# EAGLE board roller_sensor (EAGLE 4.16)
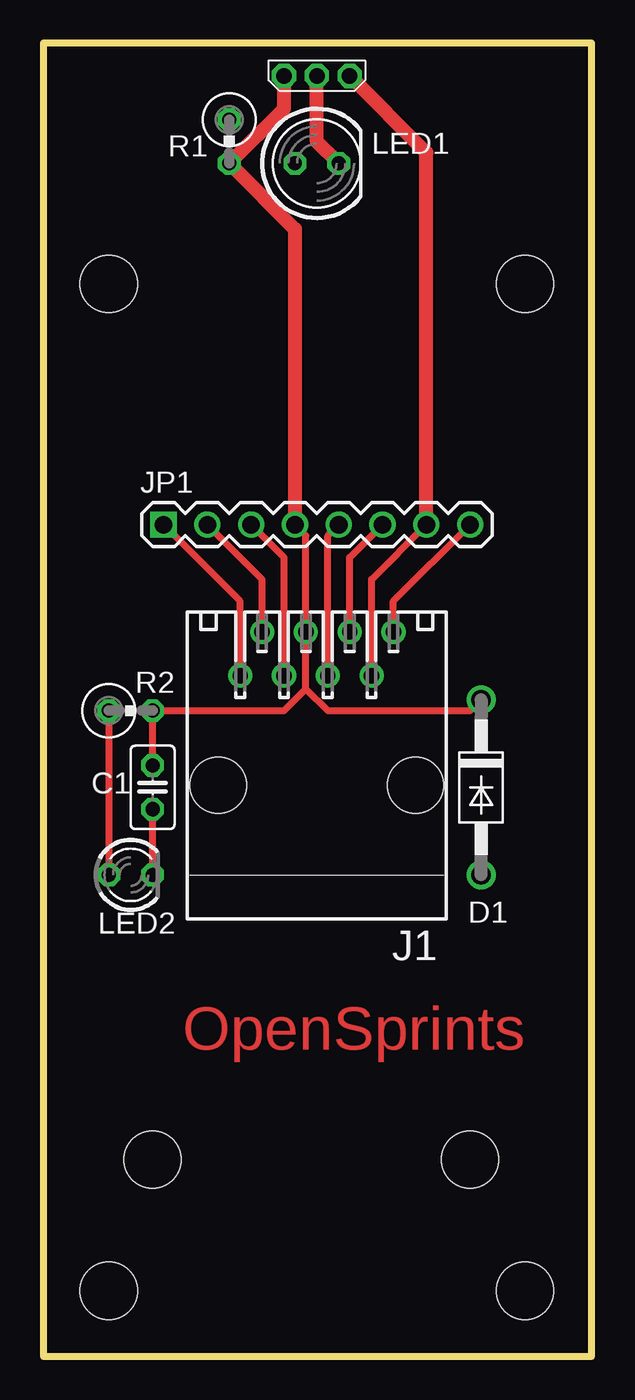
[diagram p0: board, top side]
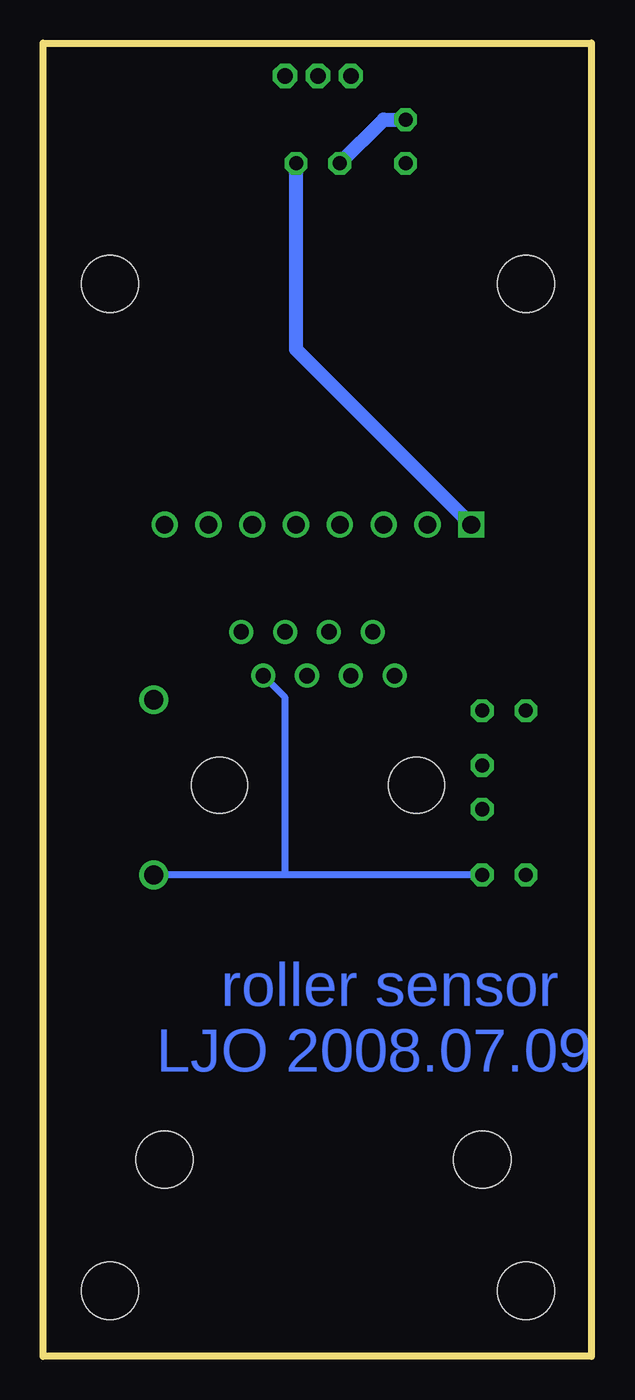
[diagram p1: board, bottom side, seen from below]

Size 31.8 x 76.19 mm. Coordinates in mm from the lower left corner, seen from the top.
Outline: 0,0 31.8,0 31.8,76.19 0,76.19 0,0
Copper layers (1*16): Top 0.035mm / dielectric 1.5mm / Bottom 0.035mm
Design rules "default": minimum track width 10mil, minimum drill 24mil, track to track 8mil, track to pad 8mil, pad to pad 8mil, via to via 8mil, smd to smd 8mil, copper to edge 40mil, drill to drill 8mil, minimum pad ring 10mil, minimum via ring 8mil, stop-mask expansion 4mil, vias tented up to drill 0mil, thermal gap 10mil

## Footprints (pad centres in the part's own frame; a part is rotated, then mirrored left to right if it is on the bottom)
C025-025X050 = drill 0.813 octagon: 1 -1.27,0; 2 1.27,0
DO41-10 = drill 1.118 round: A 5.08,0; C -5.08,0
A3245 = drill 0.9 pad 1.016 octagon: P$1 0,1.905; P$2 0,0; P$3 0,-1.905
555164-1 = drill 0.889 round: 1 -4.445,5.207; 2 -3.175,7.747; 3 -1.905,5.207; 4 -0.635,7.747; 5 0.635,5.207; 6 1.905,7.747; 7 3.175,5.207; 8 4.445,7.747 | hole 3.251: -5.715,-1.143; 5.715,-1.143
1X08 = drill 1.016 square: 1 0,0 | drill 1.016 round: 2 2.54,0; 3 5.08,0; 4 7.62,0; 5 10.16,0; 6 12.7,0; 7 15.24,0; 8 17.78,0
LED5MM = drill 0.813 octagon: A -1.27,0; K 1.27,0
LED3MM = drill 0.813 octagon: A -1.27,0; K 1.27,0
0309V = drill 0.813 octagon: 1 -1.27,0; 2 1.27,0
STAND-OFF = hole 3.302: 0,0

## Placement (x,y rotation side)
C1  [C025-025X050]  6.34,33.02 270 top
D1  1N4004  [DO41-10]  25.39,33.02 270 top
IC1  A3245A3245LUA-T  [A3245]  15.86,74.29 270 top
J1  [555164-1]  15.86,34.28 0 top
JP1  [1X08]  6.97,48.25 0 top
LED1  [LED5MM]  15.86,69.21 0 top
LED2  [LED3MM]  5.07,27.94 0 top
R1  [0309V]  10.78,70.48 270 top
R2  [0309V]  5.07,37.46 0 top
U$1  STAND-OFF  [STAND-OFF]  3.8,3.81 0 top
U$2  STAND-OFF  [STAND-OFF]  27.93,3.81 0 top
U$3  STAND-OFF  [STAND-OFF]  3.8,62.22 0 top
U$4  STAND-OFF  [STAND-OFF]  27.93,62.22 0 top
U$7  STAND-OFF  [STAND-OFF]  6.34,11.42 0 top
U$8  STAND-OFF  [STAND-OFF]  24.75,11.42 0 top

## Library data of the parts
C1 R1 R2 = rcl
D1 = diode
IC1 J1 = roller_sensor
JP1 U$1-U$4 U$7 U$8 = SparkFun
LED1 LED2 = led

## Nets
GND: C1.2 D1.A IC1.P$1 J1.7 JP1.7 LED2.K
N$1: LED2.A R2.1
N$2: LED1.A R1.1
N$3: J1.8 JP1.8
N$5: J1.6 JP1.6
N$6: J1.5 JP1.5
N$8: J1.3 JP1.3
N$9: J1.2 JP1.2
OUT: IC1.P$2 J1.1 JP1.1 LED1.K
VTG: C1.1 D1.C IC1.P$3 J1.4 JP1.4 R1.2 R2.2

## Tracks (layer width: path | path; a pad name or v marks a point on that pad's centre or on a via)
GND
  Top 0.406: LED2.K C1.2 | J1.7 19.04,45.08 JP1.7
  Top 0.813: IC1.P$1 22.21,69.84 JP1.7
  Bottom 0.406: LED2.K 17.77,27.94 | 17.77,27.94 D1.A | J1.7 17.77,38.22 17.77,27.94
N$1
  Top 0.406: R2.1 LED2.A
N$2
  Bottom 0.813: LED1.A 12.05,71.75 R1.1
N$3
  Top 0.406: J1.8 20.31,43.81 JP1.8
N$5
  Top 0.406: J1.6 17.77,46.35 JP1.6
N$6
  Top 0.406: J1.5 16.5,47.62 JP1.5
N$8
  Top 0.406: J1.3 13.96,46.35 JP1.3
N$9
  Top 0.406: J1.2 12.69,45.08 JP1.2
OUT
  Top 0.406: J1.1 11.42,43.81 JP1.1
  Top 0.813: IC1.P$2 15.86,70.48 LED1.K
  Bottom 0.813: JP1.1 17.13,58.41 LED1.K
VTG
  Top 0.406: C1.1 R2.2 13.96,37.46 15.23,38.73 | 15.23,38.73 J1.4 15.23,47.62 JP1.4 | D1.C 24.75,37.46 16.5,37.46 15.23,38.73
  Top 0.813: IC1.P$3 13.96,72.39 R1.2 14.59,65.4 JP1.4

## Text on the board
Top: OpenSprints
Bottom: roller sensor | LJO 2008.07.09